# Altium PCB PCB1.PcbDoc lab2.PcbDoc
Units mm, origin at the board's own origin, x right, y up, seen from the top; angles counter-clockwise.
Board outline 69.22 x 101.98 mm, 2 copper layers (Top Layer, Bottom Layer); 17 components, 38 nets, 80 pads, 0 vias.
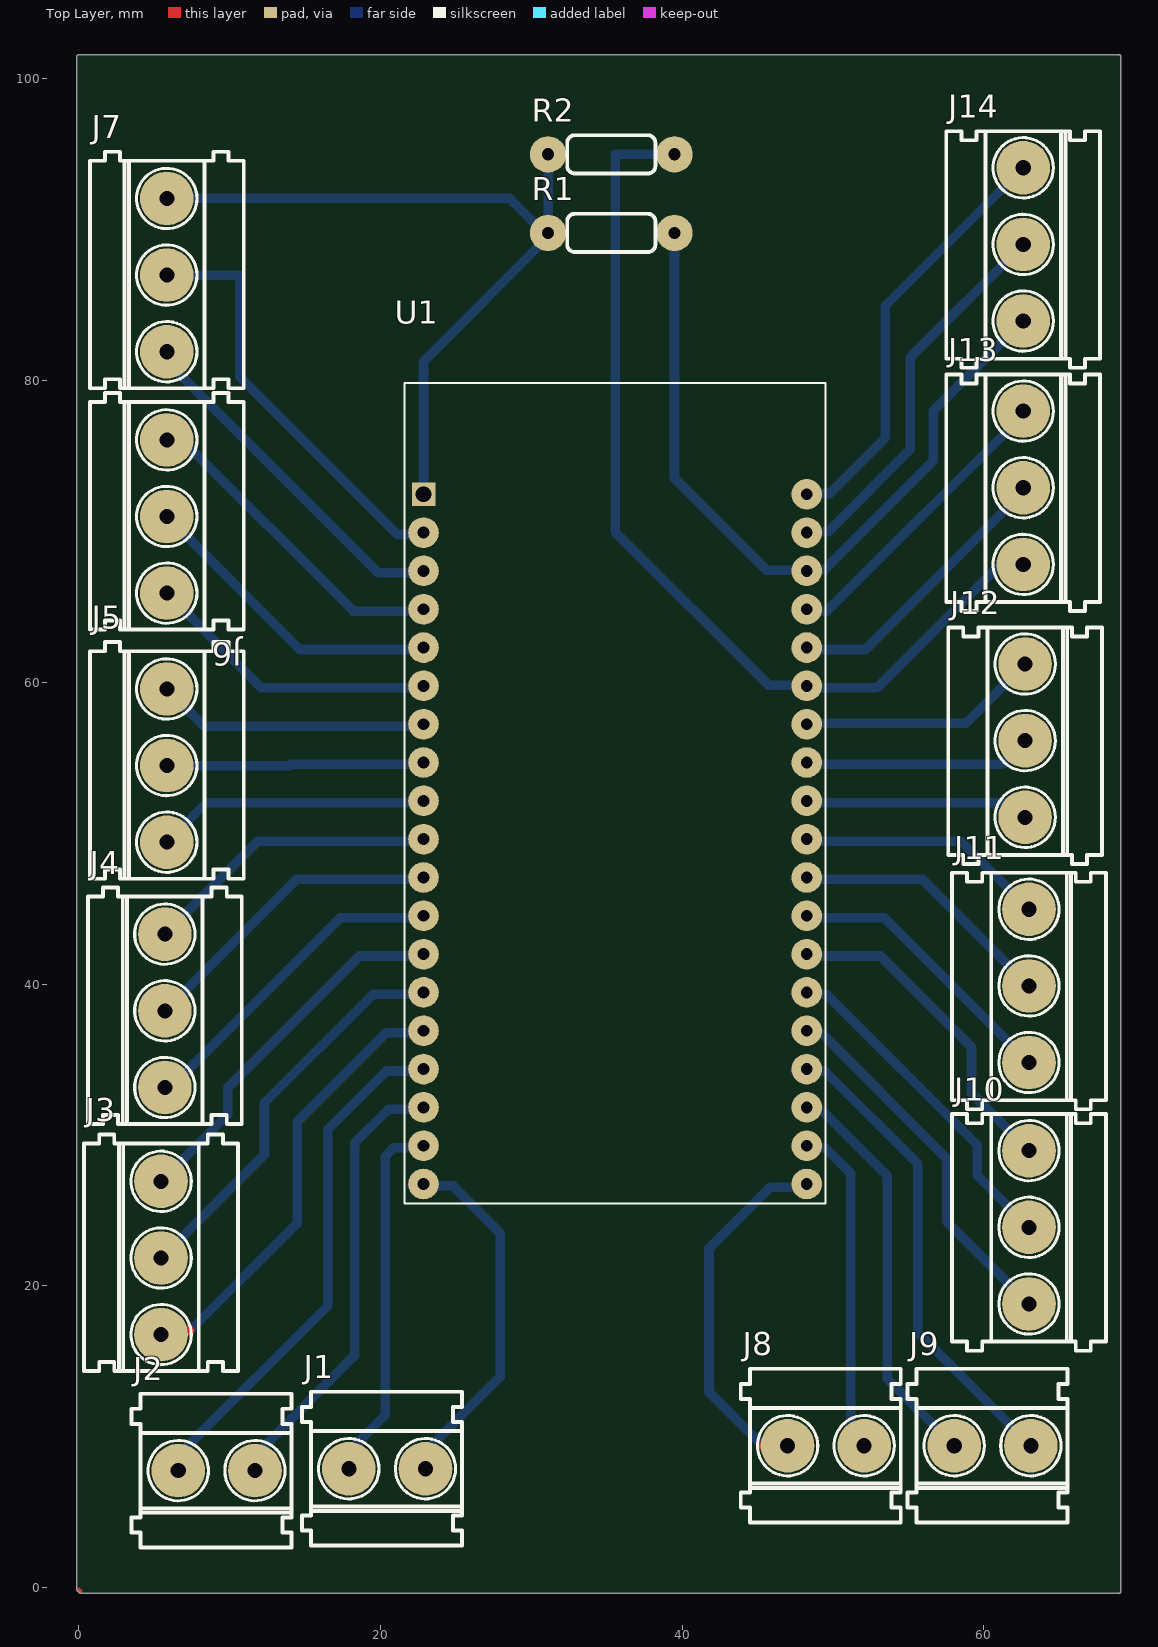
[diagram p0: Top Layer view]
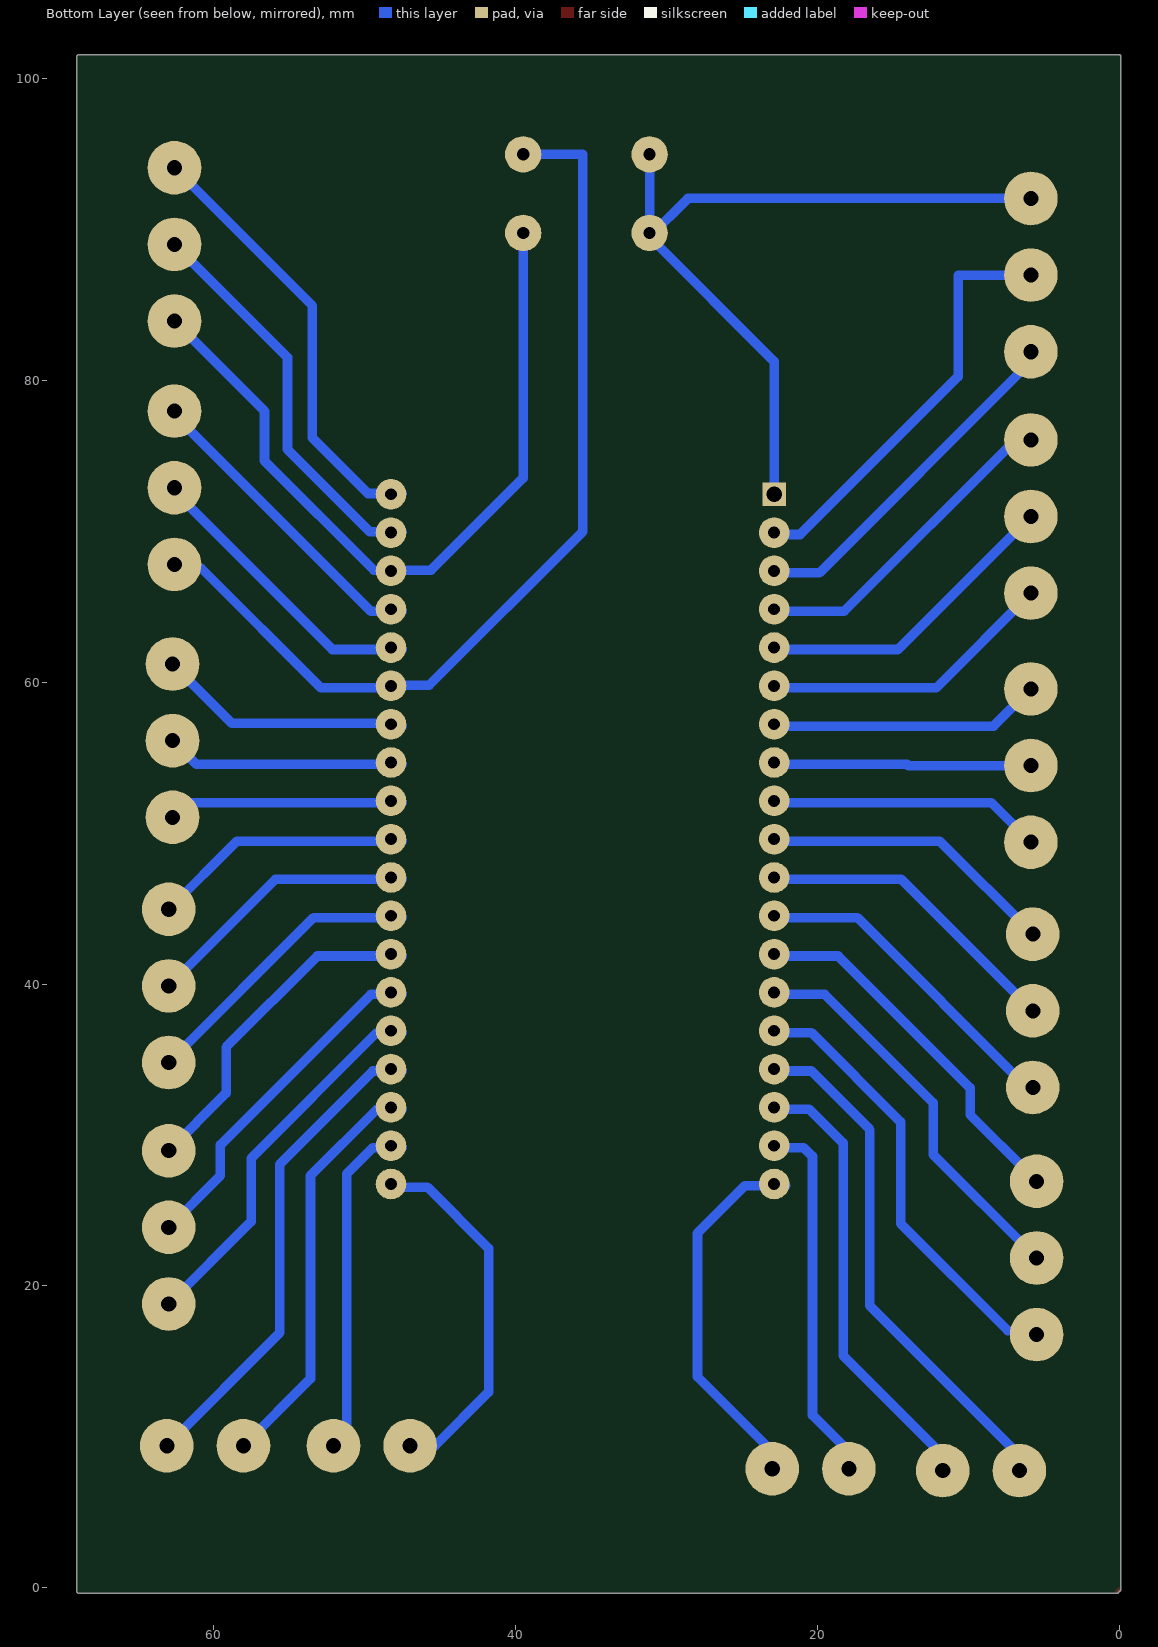
[diagram p1: Bottom Layer view, seen from below]
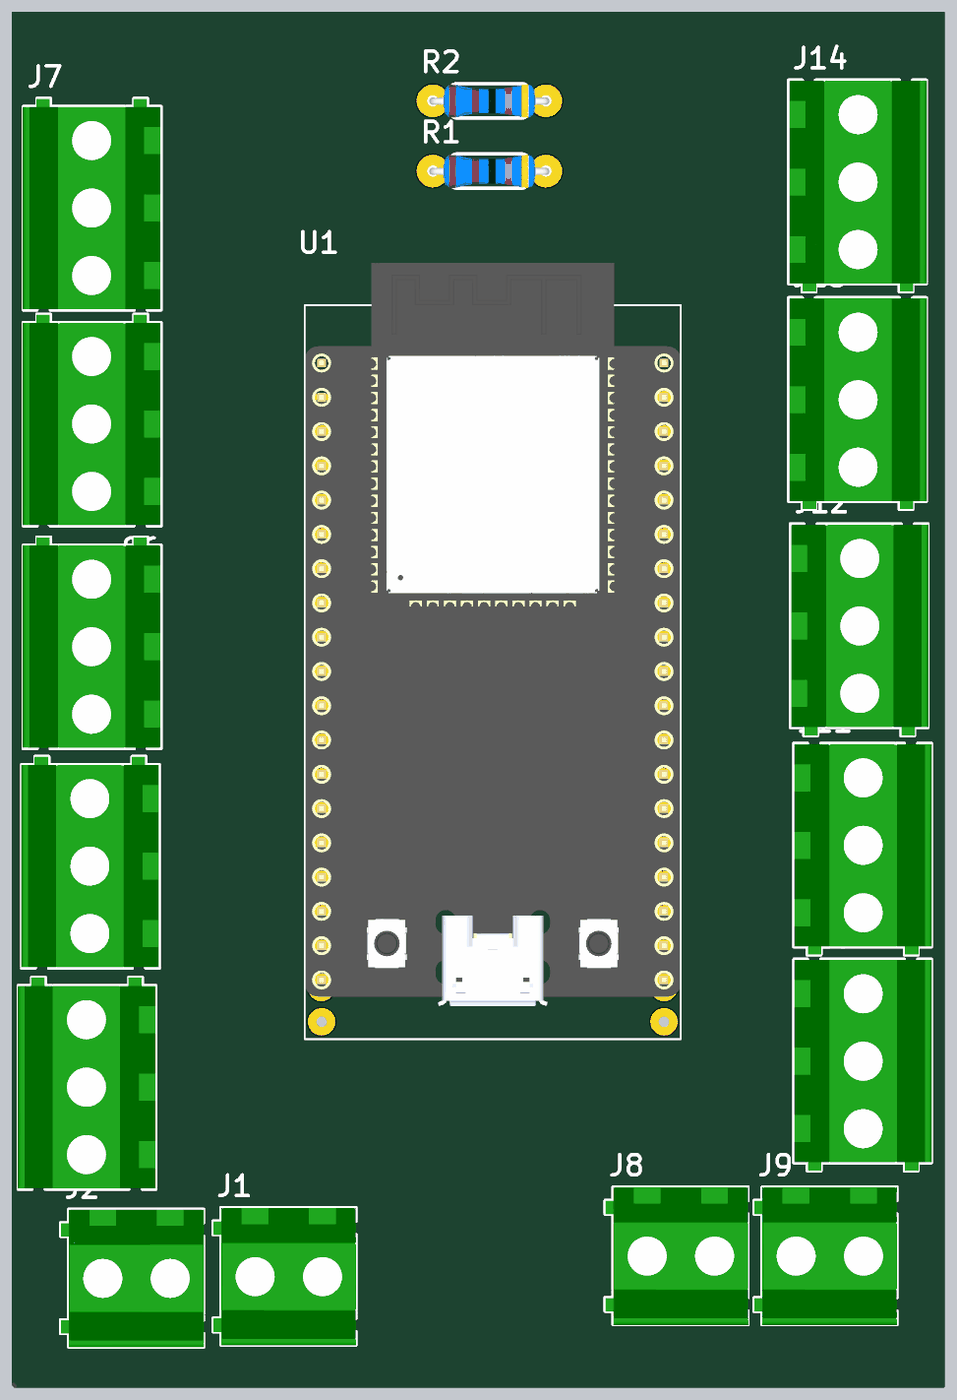
[diagram p2: 3D render of the assembled board from above, using the file's embedded part models]

## Layer stack, top to bottom
Top Solder: solder mask 0.0102, Solder Resist, Dk 3.5
Top Layer: signal copper 0.0356
Dielectric 1: dielectric 0.32, FR-4, Dk 4.8
Bottom Layer: signal copper 0.0356
Bottom Solder: solder mask 0.0102, Solder Resist, Dk 3.5

## Board outline
-0.127,-0.127 ccw(c0,-0.127) 0,-0.254 ccw(c0.127,-0.254) 0.127,-0.381 68.961,-0.381 ccw(c68.961,-0.254) 69.088,-0.254 69.088,101.473 ccw(c68.961,101.473) 68.961,101.6 0,101.6 ccw(c0,101.473) -0.127,101.473

## Design rules (kind name [scope] priority, off if disabled: settings)
Clearance [All] p1: gap=0.254 ignorepadtopadclearanceinfootprint=FALSE except(0: Arc-Hole Track-Hole SMDPad-Hole THPad-Hole Via-Hole Fill-Hole Poly-Hole Region-Hole Text-Hole)
PolygonConnect [All] p1: connectstyle=Relief reliefconductorwidth=0.254 reliefentries=4 polygonreliefangle="90 Angle" airgapwidth=0.254
RoutingVias [All] p1: holewidth=0.711 width=1.27 viastyle="Through Hole" minholewidth=0.711 minwidth=1.27 maxholewidth=0.711 maxwidth=1.27
SolderMaskExpansion [All] p1: expansion=0.102
Width [All] p1: maxlimit=0.762 minlimit=0.508 preferedwidth=0.635
30 further rules are at their usual default settings.

## Classes and differential pairs
component class "AT long bus (13.3 x 4.2 inches)": P?

## Components (designator, comment, footprint, x,y, rotation, side; value= is the part's Value field where it differs from the comment)
J1 "" "TB_200Mil 2 P" 17.907,7.874 r0 top
J2 "" "TB_200Mil 2 P" 6.604,7.747 r0 top
J3 "" "TB_200Mil 3 P" 5.461,26.924 r270 top
J4 "" "TB_200Mil 3 P" 5.715,43.307 r270 top
J5 "" "TB_200Mil 3 P" 5.842,59.563 r270 top
J6 "" "TB_200Mil 3 P" 5.842,76.073 r270 top
J7 "" "TB_200Mil 3 P" 5.842,92.075 r270 top
J8 "" "TB_200Mil 2 P" 46.99,9.398 r0 top
J9 "" "TB_200Mil 2 P" 58.039,9.398 r0 top
J10 "" "TB_200Mil 3 P" 62.992,18.796 r90 top
J11 "" "TB_200Mil 3 P" 62.992,34.798 r90 top
J12 "" "TB_200Mil 3 P" 62.738,51.054 r90 top
J13 "" "TB_200Mil 3 P" 62.611,67.818 r90 top
J14 "" "TB_200Mil 3 P" 62.611,83.947 r90 top
R1 "4.7K" 4.7K 39.497,89.789 r180 top
R2 "4.7K" 4.7K 39.497,94.996 r180 top
U1 "ESP32-DEVKITC-32D" MODULE_ESP32-DEVKITC-32D 35.56,52.705 r0 top

## Footprints (in the part's own frame and the unit in brackets; to place one, negate y for a bottom-side part, rotate by r counter-clockwise, add the part's x,y. Pads: shape width x height; smd on the part's side, far side on the other; paste and mask are expansions set on the pad)
4.7K [mil]
  round 95 hole 32: 1(0,0) 2(330,0)
  silkscreen extent 50,-50 280,50, body extent -47,-48 377,50, height 38
MODULE_ESP32-DEVKITC-32D [mil]
  rect 61.42x61.42 hole 40.94: 1(-500,777.95)
  round 80 hole 31: 2(-500,677.95) 3(-500,577.95) 4(-500,477.95) 5(-500,377.95) 6(-500,277.95) 7(-500,177.95) 8(-500,77.95) 9(-500,-22.05) 10(-500,-122.05) 11(-500,-222.05) 12(-500,-322.05) 13(-500,-422.05) 14(-500,-522.05) 15(-500,-622.05) 16(-500,-722.05) 17(-500,-822.05) 18(-500,-922.05) 19(-500,-1022.05) 20(500,777.95) 21(500,677.95) 22(500,577.95) 23(500,477.95) 24(500,377.95) 25(500,277.95) 26(500,177.95) 27(500,77.95) 28(500,-22.05) 29(500,-122.05) 30(500,-222.05) 31(500,-322.05) 32(500,-422.05) 33(500,-522.05) 34(500,-622.05) 35(500,-722.05) 36(500,-822.05) 37(500,-922.05) 38(500,-1022.05)
  silkscreen extent -549,-1073 549,1069, body extent -550,-976 550,1193, height 128
"TB_200Mil 2 P" [mil]
  round 140 hole 39.37: 1(0,0) 2(200,0)
  silkscreen extent -122,-201 295,201, body extent -121,-202 296,200, height 551
"TB_200Mil 3 P" [mil]
  round 140 hole 39.37: 1(0,0) 2(200,0) 3(400,0)
  silkscreen extent -122,-201 495,201, body extent -121,-203 493,199, height 551

## Part data
J1 J2 J8 J9: library part "TB 2 PIN"
J3 J4 J5 J6 J7 J10 J11 J12 J13 J14: library part "TB 3 PIN"
U1: "EVAL BOARD FOR ESP-WROOM-32", Package=None, Availability=Warning, Check_prices=https://www.snapeda.com/parts/ESP32-DEVKITC-32D/Espressif%20Systems/view-part/2777395/?ref=eda, MF="Espressif Systems", MP=ESP32-DEVKITC-32D, Price=None, Purchase-URL=https://pricing.snapeda.com/search/part/ESP32-DEVKITC-32D/?ref=eda, SnapEDA_Link=https://www.snapeda.com/parts/ESP32-DEVKITC-32D/Espressif%20Systems/view-part/2777395/?ref=snap

## Nets (pads, with @x,y where several pads share a name; then routed paths per layer and width w, separated by ;. In a path a pad name is that pad's centre, name@x,y a point inside that pad or via, vN(x,y) a via of type N, cw(c..) or ccw(c..) an arc to the next point about the centre after c; other vN are vias at no path point)
NetJ1_1: J1.1 U1.18 | length 22.6
  Bottom Layer w0.635: J1.1@17.907,9.017 20.32,11.43 20.32,28.575 20.903,29.158 U1.18@22.098,29.158
NetJ1_2: J1.2 U1.19 | length 23.7
  Bottom Layer w0.635: U1.19@22.098,26.618 22.479,26.618 24.817,26.618 27.94,23.495 27.94,13.97 J1.2@22.987,9.017
NetJ2_1: J2.1 U1.16 | length 32.7
  Bottom Layer w0.635: J2.1@6.731,8.89 16.51,18.669 16.51,30.353 20.395,34.238 U1.16@22.098,34.238
NetJ2_2: J2.2 U1.17 | length 28
  Bottom Layer w0.635: J2.2@11.811,8.89 18.288,15.367 18.288,29.464 20.522,31.698 U1.17@22.098,31.698
NetJ3_1: J3.1 U1.13 | length 23.3
  Bottom Layer w0.635: J3.1@5.842,27.305 9.875,31.338 9.875,33.116 18.617,41.858 U1.13@22.098,41.858
NetJ3_2: J3.2 U1.14 | length 25.3
  Bottom Layer w0.635: J3.2@5.842,22.225 12.319,28.702 12.319,32.131 19.506,39.318 U1.14@22.098,39.318
NetJ3_3: J3.3 U1.15 | length 28.8
  Top Layer w0.635: J3.3@5.842,17.018 7.366,17.018
  Bottom Layer w0.635: 7.366,17.018 14.478,24.13 14.478,30.861 20.395,36.778 U1.15@22.479,36.778
NetJ4_1: J4.1 U1.10 | length 18.9
  Bottom Layer w0.635: J4.1 11.886,49.478 U1.10@22.098,49.478
NetJ4_2: J4.2 U1.11 | length 20
  Bottom Layer w0.635: J4.2 14.426,46.938 U1.11@22.098,46.938
NetJ4_3: J4.3 U1.12 | length 21
  Bottom Layer w0.635: J4.3 6.096,33.147 17.347,44.398 U1.12@22.098,44.398
NetJ5_1: J5.1 U1.7 | length 17.3
  Bottom Layer w0.635: J5.1 8.307,57.098 U1.7@22.098,57.098
NetJ5_2: J5.2 U1.8 | length 16.3
  Bottom Layer w0.635: J5.2 13.97,54.483 14.045,54.558 U1.8@22.098,54.558
NetJ5_3: J5.3 U1.9 | length 17.3
  Bottom Layer w0.635: J5.3 8.457,52.018 U1.9@22.098,52.018
NetJ6_1: J6.1 U1.4 | length 21
  Bottom Layer w0.635: J6.1 6.858,76.073 18.213,64.718 U1.4@22.098,64.718
NetJ6_2: J6.2 U1.5 | length 19.9
  Bottom Layer w0.635: J6.2 14.657,62.178 U1.5@22.098,62.178
NetJ6_3: J6.3 U1.6 | length 18.9
  Bottom Layer w0.635: J6.3 12.117,59.638 U1.6@22.098,59.638
NetJ7_1: J7.1 R1.2 R2.2 U1.1 | length 52.1
  Bottom Layer w0.635: J7.1 28.575,92.075 31.115,89.535 22.86,81.28 U1.1 U1.1@22.86,72.338 ; R1.2 R2.2
NetJ7_2: J7.2 U1.2 | length 28.3
  Bottom Layer w0.635: J7.2@5.842,86.36 J7.2 10.668,86.995 10.668,80.264 21.134,69.798 U1.2@22.479,69.798
NetJ7_3: J7.3 U1.3 | length 23
  Bottom Layer w0.635: J7.3@6.35,82.423 6.35,80.772 19.864,67.258 U1.3@22.098,67.258
NetJ8_1: J8.1 U1.38 | length 24.1
  Top Layer w0.635: J8.1@45.339,9.398 J8.1
  Bottom Layer w0.635: J8.1@45.339,9.398 41.783,12.954 41.783,22.479 45.847,26.543 U1.38@48.006,26.543
NetJ8_2: J8.2 U1.37 | length 22.8
  Bottom Layer w0.635: U1.37@47.498,29.158 47.879,29.158 49.455,29.158 51.181,27.432 51.181,10.287 J8.2
NetJ9_1: J9.1 U1.36 | length 27.7
  Bottom Layer w0.635: U1.36@47.498,31.698 47.879,31.698 49.201,31.698 53.594,27.305 53.594,13.843 J9.1
NetJ9_2: J9.2 U1.35 | length 32.5
  Bottom Layer w0.635: U1.35@47.498,34.238 47.879,34.238 49.455,34.238 55.626,28.067 55.626,16.891 J9.2
NetJ10_1: J10.1 U1.34 | length 25.4
  Bottom Layer w0.635: U1.34@47.498,36.778 47.879,36.778 49.201,36.778 57.531,28.448 57.531,24.257 J10.1
NetJ10_2: J10.2 U1.33 | length 23.1
  Bottom Layer w0.635: U1.33@47.498,39.318 47.879,39.318 49.582,39.318 59.563,29.337 59.563,27.305 J10.2
NetJ10_3: J10.3 U1.32 | length 22.8
  Bottom Layer w0.635: U1.32@47.498,41.858 47.879,41.858 53.138,41.858 59.182,35.814 59.182,32.766 J10.3@63.119,28.829
NetJ11_1: J11.1 U1.31 | length 19.5
  Bottom Layer w0.635: U1.31@47.498,44.398 53.392,44.398 J11.1
NetJ11_2: J11.2 U1.30 | length 18.4
  Bottom Layer w0.635: U1.30@47.498,46.938 55.932,46.938 J11.2
NetJ11_3: J11.3 U1.29 | length 17.4
  Bottom Layer w0.635: U1.29@47.498,49.478 58.472,49.478 J11.3
NetJ12_1: J12.1 U1.28 | length 15.6
  Bottom Layer w0.635: U1.28@47.498,52.018 47.879,52.018 61.774,52.018 J12.1
NetJ12_2: J12.2 U1.27 | length 15.9
  Bottom Layer w0.635: U1.27@47.498,54.558 47.879,54.558 61.162,54.558 J12.2
NetJ12_3: J12.3 U1.26 | length 16.9
  Bottom Layer w0.635: U1.26@47.498,57.098 47.677,57.277 58.801,57.277 J12.3
NetJ13_1: J13.1 R2.1 U1.25 | length 63.5
  Bottom Layer w0.635: R2.1 35.56,94.996 35.56,69.977 45.72,59.817 U1.25@47.498,59.817 ; U1.25@47.498,59.638 47.879,59.638 52.907,59.638 60.833,67.564 J13.1@62.611,67.564
NetJ13_2: J13.2 U1.24 | length 19.4
  Bottom Layer w0.635: U1.24@47.498,62.178 52.145,62.178 J13.2@62.611,72.644
NetJ13_3: J13.3 U1.23 | length 20.5
  Bottom Layer w0.635: U1.23@47.498,64.718 49.605,64.718 J13.3@62.611,77.724
NetJ14_1: J14.1 R1.1 U1.22 | length 50.7
  Bottom Layer w0.635: R1.1 39.497,73.533 45.593,67.437 47.498,67.437 49.403,67.437 56.642,74.676 56.642,77.978 J14.1
NetJ14_2: J14.2 U1.21 | length 26.6
  Bottom Layer w0.635: U1.21@47.498,69.977 49.657,69.977 55.118,75.438 55.118,81.534 J14.2
NetJ14_3: J14.3 U1.20 | length 29.2
  Bottom Layer w0.635: U1.20@47.498,72.517 49.784,72.517 53.467,76.2 53.467,84.963 J14.3
copper on no net: | length 0.2
  Top Layer w0.254: 0,-0.127 0.127,-0.254

## Silkscreen, mask and mechanical layers (free items; w line width, h text height)
Mechanical 1:
  lines w0.254: 0,-0.127 0,101.473 68.961,101.473 68.961,-0.254 0.127,-0.254